# Altium PCB Temp_hum_sensor_Atmega328.PcbDoc
Units mm, origin at the board's own origin, x right, y up, seen from the top; angles counter-clockwise.
Board outline 35.1 x 35.1 mm, 2 copper layers (Top Layer, Bottom Layer); 27 components, 27 nets, 121 pads, 9 vias.
Unrouted connection lines stored in the file: 48.
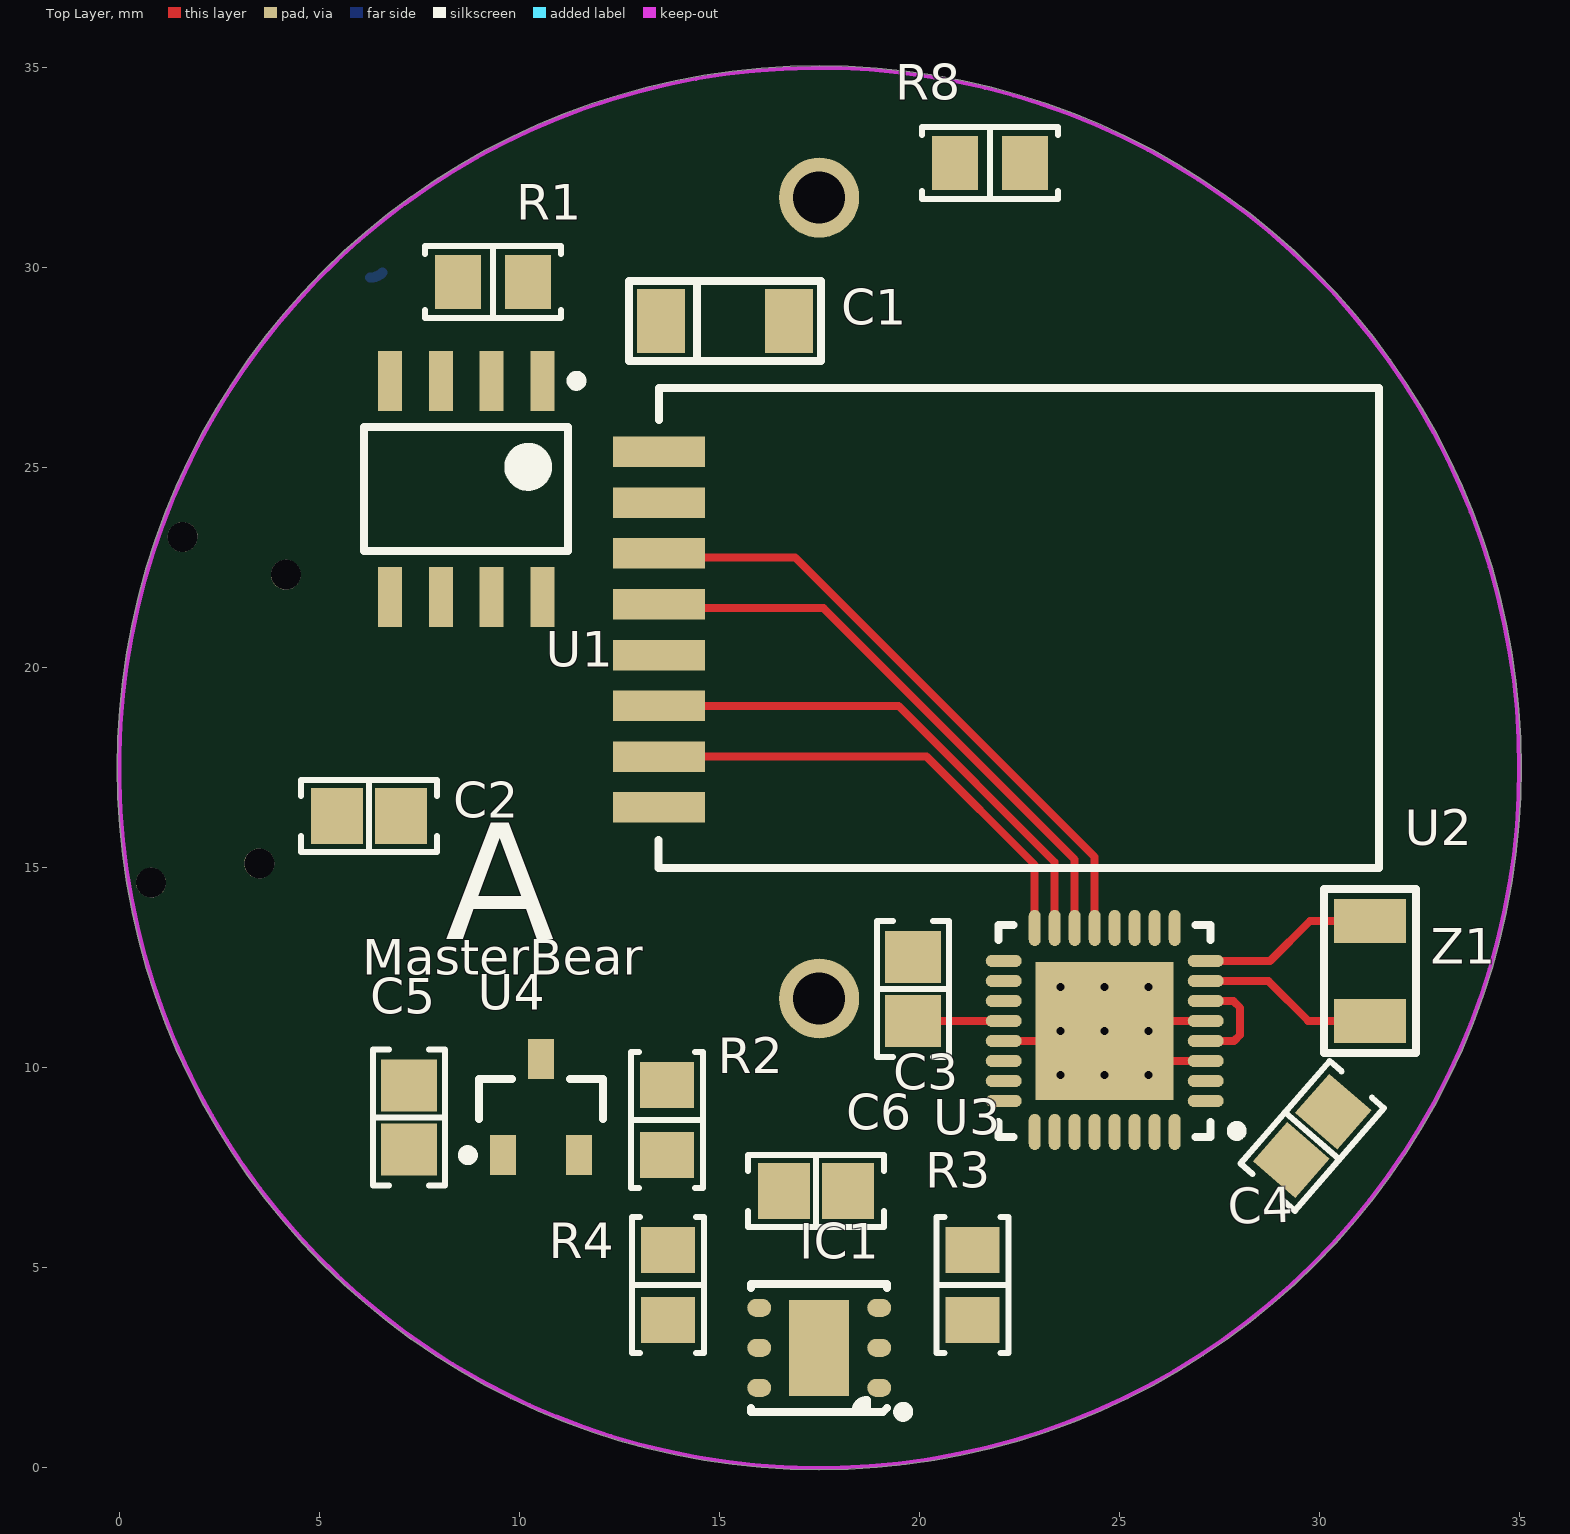
[diagram p0: Top Layer view]
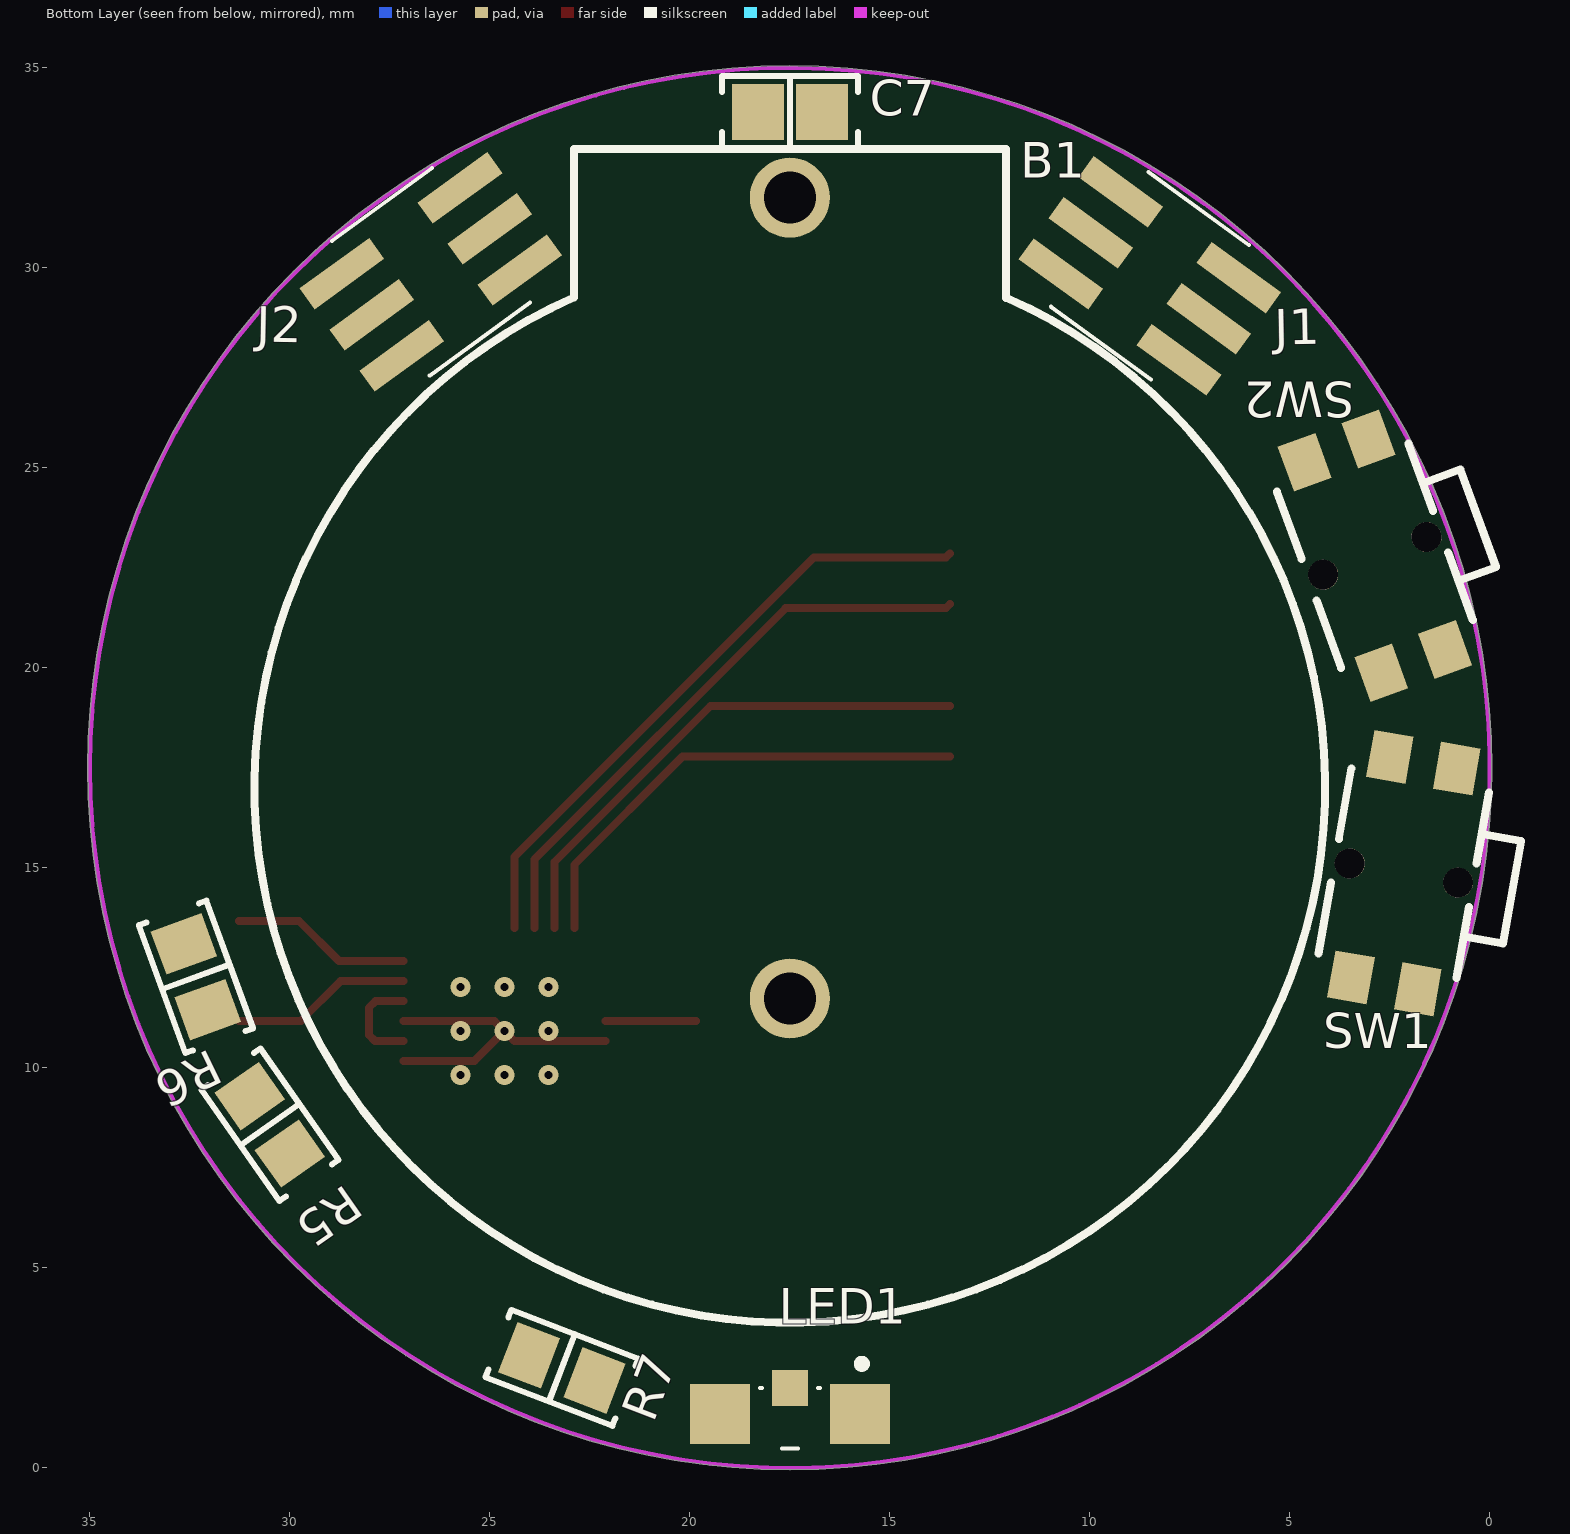
[diagram p1: Bottom Layer view, seen from below]

## Layer stack, top to bottom
Top Solder: solder mask 0.0102, Solder Resist, Dk 3.5
Top Layer: signal copper 0.0356
Dielectric 1: dielectric 0.32, FR-4, Dk 4.8
Bottom Layer: signal copper 0.0356
Bottom Solder: solder mask 0.0102, Solder Resist, Dk 3.5

## Board outline
17.5,-0.05 cw(c17.5,17.5) -0.05,17.5 cw(c17.5,17.5) 17.5,35.05 cw(c17.5,17.5) 35.05,17.5 cw(c17.5,17.5)

## Design rules (kind name [scope] priority, off if disabled: settings)
Clearance [All] p1: gap=0.2 ignorepadtopadclearanceinfootprint=FALSE
ComponentClearance [All] p1: gap=0.254 collisioncheckmode=3 verticalgap=0.254 showdistances=TRUE
MinimumSolderMaskSliver [All] p1: minsoldermaskwidth=0.1
PolygonConnect [All] p1: thpad.connectstyle=Relief thpad.reliefconductorwidth=0.3 thpad.reliefentries=4 thpad.polygonreliefangle="90 Angle" thpad.airgapwidth=0.25 smdpad.connectstyle=Relief smdpad.reliefconductorwidth=0.254 smdpad.reliefentries=4 smdpad.polygonreliefangle="90 Angle" smdpad.airgapwidth=0.254 via.connectstyle=Direct via.reliefconductorwidth=0.254 via.reliefentries=4 via.polygonreliefangle="90 Angle" via.airgapwidth=0.254
RoutingVias [All] p1: holewidth=0.2 width=0.5 viastyle="Through Hole" minholewidth=0.2 minwidth=0.5 maxholewidth=0.5 maxwidth=0.9
SilkToSilkClearance [All] p1: silktosilkclearance=0.15
SolderMaskExpansion [All] p1: expansion=0.1 istentingtop=FALSE
Width [All] p1: maxlimit=3 minlimit=0.2 preferedwidth=0.3
27 further rules are at their usual default settings.

## Classes and differential pairs
net class Power: GND VCC

## Components (designator, comment, footprint, x,y, rotation, side; value= is the part's Value field where it differs from the comment)
B1 "Keystone 1053" "KEYSTONE 1053" 17.5,17 r90 bottom locked
C1 "Tantalum capacitor, 4.7μF, 10V, ±10%, 2Ohm, case A (3216), -55...+125°C" "CAP: TANTAL-A" 15.15,28.675 r0 top value=4.7μF
C2 "0.1µF" "CAP 0805_2012" 6.25,16.3 r0 top
C3 "0.1µF" "CAP 0805_2012" 19.85,11.975 r270 top
C4 "0.1µF" "CAP 0805_2012" 29.825,8.3 r49 top
C5 "0.1µF" "CAP 0805_2012" 7.239,8.763 r270 top
C6 "0.1µF" "CAP 0805_2012" 17.422,6.92 r180 top
C7 "0.1µF" "CAP 0805_2012" 17.5,33.9 r180 bottom
IC1 "STS21" "SENSIRION STS21" 17.5,3 r180 top locked
J1 "M50-3100345" M503100345 8.5,29.8 r126 bottom locked
J2 "M50-3100345" M503100345 26.475,29.9 r234 bottom locked
LED1 "IN-S121DAS5R5B" INS126ASUW 17.5,2 r0 bottom locked
R1 "20 kOhms" "RES 0805_2012" 9.35,29.65 r180 top
R2 "4.7 kOhms" "RES 0805_2012" 13.7,8.7 r90 top
R3 "4.7 K" "RES 0805_2012" 21.336,4.572 r270 top
R4 "4.7 K" "RES 0805_2012" 13.716,4.572 r270 top
R5 "470 kOhms" "RES 0805_2012" 32.35,12.275 r250 bottom
R6 "1 MOhms" "RES 0805_2012" 30.5,8.575 r235 bottom
R7 "18 kOhms" "RES 0805_2012" 23.2,2.5 r201 bottom locked
R8 "10 kOhms" "RES 0805_2012" 21.775,32.625 r0 top
SW1 "436331045822" 4363x10458xx 2.149,14.87 r100 bottom locked
SW2 "436331045822" 4363x10458xx 2.875,22.8 r70 bottom locked
U1 "AT25DF512C-SSHN-B" SOIC127P600X175-8N 8.675,24.475 r270 top
U2 "Wi-Fi module, 802.11 b/g/n, 32 bit, SDIO/SPI/UART, -40...+85°C, 21x16mm" "MOD: NRF24 Mini SMD" 22.5,21 r0 top locked
U3 "Atmega328P-MU" "QFN-32 (5X5)" 24.638,10.922 r180 top
U4 "ATSHA204A-STUCZ-T" SOT23-3 10.541,9.017 r90 top
Z1 "Crystal, 8.000MHz, 12.5pF, ±20ppm, case 3215, -40...+85°C" "OSC: 3215" 31.275,12.425 r270 top

## Footprints (in the part's own frame and the unit in brackets; to place one, negate y for a bottom-side part, rotate by r counter-clockwise, add the part's x,y. Pads: shape width x height; smd on the part's side, far side on the other; paste and mask are expansions set on the pad)
4363x10458xx [mm] "3.5x4.7 mm SMD side push"
  rect 1.2x1 smd: 1(2.8,0.85) 2(2.8,-0.85) 3(-2.8,0.85) 4(-2.8,-0.85)
  round 0.75 hole 0.75 unplated: MH1(0,1.375) MH2(0,-1.375)
  silkscreen extent -2.35,-2.75 2.35,1.75, body extent -3.2,-2.75 3.2,1.75, height 1.65
"CAP 0805_2012" [mm] "Chip Capacitor, 2-Leads, Body 2.00x1.20mm, IPC Medium Density"
  rect 1.3x1.4 smd: 1(-0.8,0) 2(0.8,0)
  silkscreen extent -1.7,-0.9 1.7,0.9, body extent -1,-0.64 1,0.64, height 1.26
"CAP: TANTAL-A" [mm]
  rect 1.2x1.6 smd: 1(-1.6,0) 2(1.6,0)
  silkscreen extent -2.4,-1 2.4,1, body extent -1.7,-0.84 1.7,0.84, height 1.71
INS126ASUW [mm]
  rect 1.5x1.5 smd: 1(-1.75,0.65) 2(1.75,0.65)
  rect 0.9x0.9 smd: 3(0,0)
  silkscreen extent -1.9,-0.7 0.75,1.52
"KEYSTONE 1053" [mm]
  round 2 hole 1.3: 1(14.755,0) 2(-5.265,0)
  silkscreen extent -13.37,-13.38 15.97,13.38, body extent -13.44,-13.42 15.9,13.33, height 9.56
M503100345 [mm]
  rect 0.65x2.15 smd: 1(-1.27,-1.825) 2(-1.27,1.825) 3(0,-1.825) 4(0,1.825) 5(1.27,-1.825) 6(1.27,1.825)
  silkscreen extent -2.08,-1.55 2.08,1.55, body extent -2.06,-2.52 2.1,2.52, height 4.55
"MOD: NRF24 Mini SMD" [mm]
  rect 2.3x0.762 smd: 1(-9,-4.49) 2(-9,-3.22) 3(-9,-1.95) 4(-9,-0.68) 5(-9,0.59) 6(-9,1.86) 7(-9,3.13) 8(-9,4.4)
  round 0.5 on Top Overlay: ""(10,-7)
  silkscreen extent -9.02,-6 9,6, body extent -9.02,-6 8.98,6, height 0.8
"OSC: 3215" [mm]
  rect 1.1x1.8 smd: 1(-1.25,0) 2(1.25,0)
  silkscreen extent -2.05,-1.15 2.05,1.15, body extent -1.61,-0.76 1.61,0.76, height 0.91
"QFN-32 (5X5)" [mm] "QFN, 32-Leads, Body 5,00x5,00mm, Pitch 0,50mm, Thermal Pad 3,10x3,10mm, IPC Medium Density"
  oval 0.9x0.3 smd mask+0.07: 1(-2.525,1.75) 2(-2.525,1.25) 3(-2.525,0.75) 4(-2.525,0.25) 5(-2.525,-0.25) 6(-2.525,-0.75) 7(-2.525,-1.25) 8(-2.525,-1.75) 17(2.525,-1.75) 18(2.525,-1.25) 19(2.525,-0.75) 20(2.525,-0.25) 21(2.525,0.25) 22(2.525,0.75) 23(2.525,1.25) 24(2.525,1.75)
  oval 0.3x0.9 smd mask+0.07: 9(-1.75,-2.575) 10(-1.25,-2.575) 11(-0.75,-2.575) 12(-0.25,-2.575) 13(0.25,-2.575) 14(0.75,-2.575) 15(1.25,-2.575) 16(1.75,-2.575) 25(1.75,2.525) 26(1.25,2.525) 27(0.75,2.525) 28(0.25,2.525) 29(-0.25,2.525) 30(-0.75,2.525) 31(-1.25,2.525) 32(-1.75,2.525)
  rect 3.45x3.45 smd: 33(0,0)
  silkscreen extent -3.42,-2.65 2.65,2.65, body extent -2.5,-2.5 2.5,2.5, height 1
"RES 0805_2012" [mm] "Chip Resistor, 2-Leads, Body 2.00x1.25mm, IPC Medium Density"
  rect 1.15x1.35 smd: 1(-0.875,0) 2(0.875,0)
  silkscreen extent -1.7,-0.9 1.7,0.9, body extent -0.95,-0.62 1.05,0.63, height 0.6
"SENSIRION STS21" [mm] "DFN, 6-Leads, Body 3.00x3.00mm, Pitch 1.00mm, Thermal Pad 1.50x2.40mm, IPC Medium Density"
  oval 0.6x0.45 smd: 1(-1.5,1) 2(-1.5,0) 3(-1.5,-1) 4(1.5,-1) 5(1.5,0) 6(1.5,1)
  rect 1.5x2.4 smd: 7(0,0)
  silkscreen extent -2.23,-1.6 1.7,1.72, body extent -1.5,-1.5 1.5,1.5, height 1.1
SOIC127P600X175-8N [mm] "SOIC, 8-Leads, Body 4,93x3,90mm, Pitch 1,27mm, IPC Medium Density"
  rect 1.5x0.6 smd: 1(-2.7,1.905) 2(-2.7,0.635) 3(-2.7,-0.635) 4(-2.7,-1.905) 5(2.7,-1.905) 6(2.7,-0.635) 7(2.7,0.635) 8(2.7,1.905)
  silkscreen extent -2.82,-2.55 1.55,2.88, body extent -3,-2.55 3,2.55, height 1.75
SOT23-3 [mm] "SOT23, 3-Leads, Body 2,86x2,37mm, Pitch 0,95mm, IPC Medium Density"
  rect 1x0.65 smd: 1(-1.2,0.95) 2(-1.2,-0.95) 3(1.2,0)
  silkscreen extent -1.32,-1.55 0.7,1.95, body extent -1.39,-1.53 1.39,1.53, height 1.12

## Part data
B1: Supplier Part Number 1=36-105-3-ND, Supplier 1=Digi-Key
C1: library part Tantal_A, Manufacturer=AVX, Package="case A (3216)", PartNumber=F930J107KAAAJ6, Temperature=-55...+125°C, Tolerance=±10%, TypeCapacitor="Tantalum capacitor", TypeDielectric=X7R, Voltage=10V, HelpURL=https://www.digikey.com/product-detail/en/avx-corporation/F930J107KAAAJ6/478-12404-1-ND/9645231, Impedance=2Ohm, ValueManufacturerPartNumber="Tantalum capacitor, 4.7μF, 10V, ±10%, 2Ohm, case A (3216), -55...+125°C"
C2 C3 C4 C5 C6 C7: library part AC0805KKX8R9BB104, "CAP CER 0805 10% X8R 50V 100NF", Device Package="0805 (2012 Metric)", Manufacturer=Yageo, Operating Temperature="-55°C ~ 150°C", Ratings=AEC-Q200, Supplier Part Number 1=311-4624-1-ND, Temperature Coefficient=X8R, Tolerance=±10%, Voltage - Rated=50V, Applications=Automotive, Capacitance=0.1µF, ComponentLink1Description=Datasheet, ComponentLink1URL=http://www.yageo.com/documents/recent/AC0805KKX8R9BB104.pdf, ComponentLink2Description="DigiKey Link", ComponentLink2URL=http://digikey.com/product-detail/en/yageo/AC0805KKX8R9BB104/311-4624-1-ND/9699550, LastUpdated="21/01/2020 0.02.48", Lifecycle Status=Active, Minimum Order=1, Mounting Type="Surface Mount, MLCC", Package / Case="0805 (2012 Metric)", Packaging=TapeAndReel, Part Number=AC0805KKX8R9BB104, Part Status=Active, PartId=14076, Price=0.06, Series=AC, Size / Dimension="0.079\" L x 0.049\" W (2.00mm x 1.25mm)", Supplier 1=DigiKey, Thickness (Max)="0.057\" (1.45mm)"
IC1: "SENSOR DIGITAL -40C-125C 6DFN", Device Package="6-TDFN Exposed Pad", Manufacturer="Sensirion AG", Operating Temperature="-40°C ~ 125°C", Supplier Device Package="6-DFN (3x3)", Supplier Part Number 1=1649-1016-1-ND, Voltage - Supply="2.1V ~ 3.6V", Accuracy - Highest (Lowest)=±0.2°C, ComponentLink1Description=Datasheet, ComponentLink1URL=https://www.sensirion.com/file/datasheet_sts21, ComponentLink2Description="DigiKey Link", ComponentLink2URL=http://digikey.com/product-detail/en/sensirion-ag/STS21/1649-1016-1-ND/5872298, Features="Sleep Mode", LastUpdated="20/04/2020 15.29.15", Lifecycle Status=Active, Minimum Order=1, Mounting Type="Surface Mount", Output Type=I²C, Package / Case="6-TDFN Exposed Pad", Packaging=TapeAndReel, Part Number=STS21, Part Status=Active, Price=1.70, Resolution="14 b", Sensing Temperature - Local="-40°C ~ 125°C", Sensor Type="Digital, Local", Series="Automotive, AEC-Q100", Supplier 1=DigiKey, Test Condition=25°C
J1 J2: "Connector", Manufacturer_Name=HARWIN, Mouser Part Number=855-M50-3100345, Datasheet Link=https://componentsearchengine.com/Datasheets/1/M50-3100345.pdf, Height=4.85mm, Manufacturer_Part_Number=M50-3100345, Mouser Price/Stock=https://www.mouser.co.uk/ProductDetail/Harwin/M50-3100345?qs=Jph8NoUxIfX8khz59iyZ%2FA%3D%3D, Supplier 1=Mouser, Supplier Part Number 1=855-M50-3100345
LED1: "LED", Manufacturer_Name=Inolux, Mouser Part Number=743-IN-S121DAS5R5B, Arrow Part Number=IN-S121DAS5R5B, Arrow Price/Stock=https://www.arrow.com/en/products/in-s121das5r5b/inolux-corporation, Datasheet Link=http://www.inolux-corp.com/datasheet/SMDLED/Bi-Color%20Side%20View/IN-S121DAS5R5B%20v1.0.pdf, Height=1mm, Manufacturer_Part_Number=IN-S121DAS5R5B, Mouser Price/Stock=https://www.mouser.com/Search/Refine.aspx?Keyword=743-IN-S121DAS5R5B
R1: library part RQ73C2A20KBTD, "RES 20 KOHMS 0.1% 1/5W 0805", Device Package="0805 (2012 Metric)", Manufacturer="TE Connectivity Passive Product", Operating Temperature="-55°C ~ 155°C", Power (Watts)="0.2W, 1/5W", Ratings=AEC-Q200, Supplier Device Package=0805, Supplier Part Number 1=A139703CT-ND, Temperature Coefficient=±10ppm/°C, Tolerance=±0.1%, ComponentLink1Description=Datasheet, ComponentLink1URL=//media.digikey.com/pdf/Data%20Sheets/Tyco%20Electronics%20P%20B%20PDFs/RQ73-0618%20v2.pdf, ComponentLink2Description="DigiKey Link", ComponentLink2URL=http://digikey.com/product-detail/en/te-connectivity-passive-product/RQ73C2A20KBTD/A139703CT-ND/9481190, Composition="Thin Film", Features="Anti-Sulfur, Automotive AEC-Q200", Height - Seated (Max)="0.026\" (0.65mm)", LastUpdated="21/01/2020 1.48.51", Lifecycle Status=Active, Minimum Order=1, Number of Terminations=2, Package / Case="0805 (2012 Metric)", Packaging=TapeAndReel, Part Number=RQ73C2A20KBTD, Part Status=Active, PartId=30516, Price=0.24, Resistance="20 kOhms", Series=RQ73, Size / Dimension="0.079\" L x 0.049\" W (2.00mm x 1.25mm)", Supplier 1=DigiKey
R2: library part RTAN0805BKE4K70, "RES 4.7K OHM 0.1% 1/5W 0805", Device Package="0805 (2012 Metric)", Manufacturer="Stackpole Electronics Inc", Operating Temperature="-55°C ~ 155°C", Power (Watts)="0.2W, 1/5W", Ratings=AEC-Q200, Supplier Device Package=0805, Supplier Part Number 1=RTAN0805BKE4K70CT-ND, Temperature Coefficient=±25ppm/°C, Tolerance=±0.1%, ComponentLink1Description=Datasheet, ComponentLink1URL=https://www.seielect.com/catalog/sei-rtan.pdf, ComponentLink2Description="DigiKey Link", ComponentLink2URL=http://digikey.com/product-detail/en/stackpole-electronics-inc/RTAN0805BKE4K70/RTAN0805BKE4K70CT-ND/6602268, Composition="Thin Film", Features="Anti-Sulfur, Automotive AEC-Q200, Moisture Resistant", Height - Seated (Max)="0.026\" (0.65mm)", LastUpdated="21/01/2020 1.48.16", Lifecycle Status=Active, Minimum Order=1, Number of Terminations=2, Package / Case="0805 (2012 Metric)", Packaging=TapeAndReel, Part Number=RTAN0805BKE4K70, Part Status=Active, PartId=31929, Price=0.17, Resistance="4.7 kOhms", Series=RTAN, Size / Dimension="0.079\" L x 0.049\" W (2.00mm x 1.25mm)", Supplier 1=DigiKey
R3 R4: library part RTAN0805BKE4K70, "RES 4.7K OHM 0.1% 1/5W 0805", Device Package="0805 (2012 Metric)", Manufacturer="Stackpole Electronics Inc", Operating Temperature="-55°C ~ 155°C", Power (Watts)="0.2W, 1/5W", Ratings=AEC-Q200, Resistance="4.7 kOhms", Supplier Device Package=0805, Supplier Part Number 1=RTAN0805BKE4K70CT-ND, Temperature Coefficient=±25ppm/°C, Tolerance=±0.1%, ComponentLink1Description=Datasheet, ComponentLink1URL=https://www.seielect.com/catalog/sei-rtan.pdf, ComponentLink2Description="DigiKey Link", ComponentLink2URL=http://digikey.com/product-detail/en/stackpole-electronics-inc/RTAN0805BKE4K70/RTAN0805BKE4K70CT-ND/6602268, Composition="Thin Film", Features="Anti-Sulfur, Automotive AEC-Q200, Moisture Resistant", Height - Seated (Max)="0.026\" (0.65mm)", LastUpdated="21/01/2020 1.48.16", Lifecycle Status=Active, Minimum Order=1, Number of Terminations=2, Package / Case="0805 (2012 Metric)", Packaging=TapeAndReel, Part Number=RTAN0805BKE4K70, Part Status=Active, PartId=31929, Price=0.17, Series=RTAN, Size / Dimension="0.079\" L x 0.049\" W (2.00mm x 1.25mm)", Supplier 1=DigiKey
R5: library part CRGP0805F470K, "CRGP 0805 470K 1%", Device Package="0805 (2012 Metric)", Manufacturer="TE Connectivity Passive Product", Operating Temperature="-55°C ~ 155°C", Power (Watts)="0.333W, 1/3W", Supplier Device Package=0805, Supplier Part Number 1=A130509CT-ND, Temperature Coefficient=±100ppm/°C, Tolerance=±1%, ComponentLink1Description=Datasheet, ComponentLink1URL=https://www.te.com/commerce/DocumentDelivery/DDEController?Action=srchrtrv&DocNm=9-1773463-9&DocType=DS&DocLang=English, ComponentLink2Description="DigiKey Link", ComponentLink2URL=http://digikey.com/product-detail/en/te-connectivity-passive-product/CRGP0805F470K/A130509CT-ND/8578341, Composition="Thick Film", Features="Pulse Withstanding", Height - Seated (Max)="0.026\" (0.65mm)", LastUpdated="21.01.2020 1:49:38", Lifecycle Status=Active, Minimum Order=1, Number of Terminations=2, Package / Case="0805 (2012 Metric)", Packaging=TapeAndReel, Part Number=CRGP0805F470K, Part Status=Active, PartId=28755, Price=0.02, Resistance="470 kOhms", Series=CRGP, Size / Dimension="0.079\" L x 0.049\" W (2.00mm x 1.25mm)", Supplier 1=DigiKey
R6: library part RCS08051M00FKEA, "RES SMD 1M OHM 1% 0.4W 0805", Device Package="0805 (2012 Metric)", Manufacturer="Vishay Dale", Operating Temperature="-55°C ~ 155°C", Power (Watts)="0.4W, 2/5W", Ratings=AEC-Q200, Supplier Device Package=0805, Supplier Part Number 1=541-2853-1-ND, Temperature Coefficient=±100ppm/°C, Tolerance=±1%, ComponentLink1Description=Datasheet, ComponentLink1URL=http://www.vishay.com/docs/20065/rcse3.pdf, ComponentLink2Description="DigiKey Link", ComponentLink2URL=http://digikey.com/product-detail/en/vishay-dale/RCS08051M00FKEA/541-2853-1-ND/5867146, Composition="Thick Film", Features="Automotive AEC-Q200, Pulse Withstanding", Height - Seated (Max)="0.020\" (0.50mm)", LastUpdated="21.01.2020 1:50:02", Lifecycle Status=Active, Minimum Order=1, Number of Terminations=2, Package / Case="0805 (2012 Metric)", Packaging=TapeAndReel, Part Number=RCS08051M00FKEA, Part Status=Active, PartId=27791, Price=0.03, Resistance="1 MOhms", Series="AccliMate™ RCU", Size / Dimension="0.079\" L x 0.049\" W (2.00mm x 1.25mm)", Supplier 1=DigiKey
R7: library part CRGP0805F18K, "CRGP 0805 18K 1%", Device Package="0805 (2012 Metric)", Manufacturer="TE Connectivity Passive Product", Operating Temperature="-55°C ~ 155°C", Power (Watts)="0.333W, 1/3W", Supplier Device Package=0805, Supplier Part Number 1=A130492CT-ND, Temperature Coefficient=±100ppm/°C, Tolerance=±1%, ComponentLink1Description=Datasheet, ComponentLink1URL=https://www.te.com/commerce/DocumentDelivery/DDEController?Action=srchrtrv&DocNm=9-1773463-9&DocType=DS&DocLang=English, ComponentLink2Description="DigiKey Link", ComponentLink2URL=http://digikey.com/product-detail/en/te-connectivity-passive-product/CRGP0805F18K/A130492CT-ND/8578324, Composition="Thick Film", Features="Pulse Withstanding", Height - Seated (Max)="0.026\" (0.65mm)", LastUpdated="21.01.2020 1:49:38", Lifecycle Status=Active, Minimum Order=1, Number of Terminations=2, Package / Case="0805 (2012 Metric)", Packaging=TapeAndReel, Part Number=CRGP0805F18K, Part Status=Active, PartId=28731, Price=0.02, Resistance="18 kOhms", Series=CRGP, Size / Dimension="0.079\" L x 0.049\" W (2.00mm x 1.25mm)", Supplier 1=DigiKey
R8: library part RNCS0805BKE10K0, "RES 10K OHM 0.1% 1/10W 0805", Device Package="0805 (2012 Metric)", Manufacturer="Stackpole Electronics Inc", Operating Temperature="-55°C ~ 155°C", Power (Watts)="0.1W, 1/10W", Ratings=AEC-Q200, Supplier Device Package=0805, Supplier Part Number 1=RNCS0805BKE10K0CT-ND, Temperature Coefficient=±25ppm/°C, Tolerance=±0.1%, ComponentLink1Description=Datasheet, ComponentLink1URL=https://www.seielect.com/catalog/sei-rncs_rnch.pdf, ComponentLink2Description="DigiKey Link", ComponentLink2URL=http://digikey.com/product-detail/en/stackpole-electronics-inc/RNCS0805BKE10K0/RNCS0805BKE10K0CT-ND/1800164, Composition="Thin Film", Features="Anti-Corrosive, Automotive AEC-Q200, Moisture Resistant", Height - Seated (Max)="0.026\" (0.65mm)", LastUpdated="21.01.2020 1:50:08", Lifecycle Status=Active, Minimum Order=1, Number of Terminations=2, Package / Case="0805 (2012 Metric)", Packaging=TapeAndReel, Part Number=RNCS0805BKE10K0, Part Status=Active, PartId=27713, Price=0.09, Resistance="10 kOhms", Series=RNCS, Size / Dimension="0.079\" L x 0.049\" W (2.00mm x 1.25mm)", Supplier 1=DigiKey
SW1 SW2: "WS-TASU SMT Tact Switch with Boss Design 4.7x3.5mm side push", Operating Temperature="-40 to +85degC", Rated Current=50mA, Rated Voltage=12VDC, ComponentLink1Description=Manufacturer, ComponentLink1URL=http://www.we-online.de, ComponentLink2Description=Datasheet, ComponentLink2URL=https://katalog.we-online.com/em/datasheet/436331045822.pdf, Contact Material="Stainless Steel", Contact Plating=Silver, Height=1.65mm, Mounting Technology=SMT, Operation Force=220gf, Packaging="Tape and Reel", Part Number=436331045822, Published Date="September 2019", Publisher="Wurth Elektronik", Terminal Material="Copper Alloy", Terminal Plating=Silver, Washable=No
U1: Supplier Part Number 1=1265-1179-5-ND, Supplier 1=Digi-Key
U2: library part NRF24L01, "Wi-Fi", Manufacturer="Espressif Systems", Package=21x16mm, Temperature=-40...+85°C, ComponentType="Wi-Fi module", Core="32 bit", HelpURL=https://www.chipdip.ru/product/esp-12e, TypeInterface=SDIO/SPI/UART, TypeStandart="802.11 b/g/n", ValueManufacturerPartNumber="Wi-Fi module, 802.11 b/g/n, 32 bit, SDIO/SPI/UART, -40...+85°C, 21x16mm"
U3: Supplier Part Number 1=ATMEGA328P-MURCT-ND, ComponentLink1Description="New link", Supplier 1=Digi-Key
U4: Supplier Part Number 1=2851689, Supplier 1=Farnell
Z1: library part Crystal_3215, Frequency=8.000MHz, LoadCapacitance=12.5pF, Manufacturer=Epson, Package="case 3215", PartNumber="FC-135 32.7680KA-A5", Temperature=-40...+85°C, Tolerance=±20ppm, HelpURL=https://www.digikey.com/product-detail/en/epson/FC-135-32.7680KA-A5/SER4103CT-ND/6188447, TypeOscilator=Crystal, ValueManufacturerPartNumber="Crystal, 8.000MHz, 12.5pF, ±20ppm, case 3215, -40...+85°C"

## Via types
v1: diameter 0.5, hole 0.2, Top Layer to Bottom Layer, 9 vias

## Nets (pads, with @x,y where several pads share a name; then routed paths per layer and width w, separated by ;. In a path a pad name is that pad's centre, name@x,y a point inside that pad or via, vN(x,y) a via of type N, cw(c..) or ccw(c..) an arc to the next point about the centre after c; other vN are vias at no path point)
ADC3: R2.2 U3.26 U4.1
GND: B1.2 C1.2 C2.2 C3.1 C4.1 C5.1 C6.1 IC1.2 IC1.7 J1.3 J1.6 LED1.1 LED1.3 U1.4 U2.7 U3.3 U3.5 U3.21 U3.33 U4.3 | length 8.1
  Top Layer w0.2: U3.21 24.388,10.672 v1(24.638,10.922) ; U3.3 25.388,10.172 v1(24.638,10.922) ; U3.5 24.888,11.172 v1(24.638,10.922)
  other v1: 23.538,9.822 24.638,9.822 25.738,9.822 23.538,10.922 25.738,10.922 23.538,12.022 24.638,12.022 25.738,12.022
MISO: U1.2 U2.2 U3.16 | length 12.1
  Top Layer w0.2: U2.2 20.183,17.78 22.888,15.075 U3.16
MOSI: U1.5 U2.3 U3.15 | length 13.2
  Top Layer w0.2: U2.3 19.479,19.05 23.388,15.141 U3.15
NetC3_2: C3.2 U3.20 | length 2.3
  Top Layer w0.2: C3.2 19.853,11.172 U3.20
NetC7_2: C7.2 J1.5 | length 0.3
  Bottom Layer w0.254: J1.5 ccw(c6.277,30.184) J1.5@6.58,29.88
NetLED1_2: LED1.2 R7.2
NetR1_2: R1.2 U1.3
NetR3_1: R3.1 U3.27
NetR4_1: R4.1 U3.28
NetR5_1: R5.1 U3.24
NetR5_2: R5.2 R6.1
NetR7_1: R7.1 U3.2
NetSW1_2: SW1.2 SW2.4
NetU3_7: U3.7 Z1.2 | length 4.5
  Top Layer w0.2: U3.7 28.728,12.172 29.725,11.175 Z1.2
NetU3_8: U3.8 Z1.1 | length 4.5
  Top Layer w0.2: U3.8 28.772,12.672 29.775,13.675 Z1.1
PB0: R1.1 U1.1 U3.12
PB1: U2.6 U3.13 | length 15.8
  Top Layer w0.2: U2.6 13.6,22.76 16.9,22.76 24.388,15.272 U3.13
PB2: U2.5 U3.14 | length 14.7
  Top Layer w0.2: U2.5 13.6,21.49 17.604,21.49 23.888,15.206 U3.14
PD0: J1.1 U3.30
PD1: J1.2 U3.31
PD2: SW1.3 U3.32
Reset: C7.1 J2.3 R8.1 SW2.1 U3.29
SCK: U1.6 U2.4
SCL: IC1.6 R4.2
SDA: IC1.1 R3.2
VCC: B1.1 C1.1 C2.1 C4.2 C5.2 C6.2 IC1.5 J1.4 R2.1 R6.2 R8.2 U1.7 U1.8 U2.8 U3.4 U3.6 U3.18 U4.2 | length 2.5
  Top Layer w0.2: U3.4 27.872,10.672 28.025,10.825 28.025,11.5 27.853,11.672 U3.6
pads on no net: IC1.3 IC1.4 J2.1 J2.2 J2.4 J2.5 J2.6 SW1.1 SW1.4 SW1.MH1 SW1.MH2 SW2.2 SW2.3 SW2.MH1 SW2.MH2 U2. U2.1 U3.1 U3.9 U3.10 U3.11 U3.17 U3.19 U3.22 U3.23 U3.25

## Keep-outs
Keep-Out Layer:
  circle w0.1: c17.5,17.5 r17.5

## Silkscreen, mask and mechanical layers (free items; w line width, h text height)
Top Overlay:
  text "A" at 8.15,12.25 h5
  text "MasterBear" at 6.075,12.025 h1.52